# Altium PCB PCB1.PcbDoc
Units mm, origin at the board's own origin, x right, y up, seen from the top; angles counter-clockwise.
Board outline 50 x 25 mm, 2 copper layers (Top Layer, Bottom Layer); 12 components, 7 nets, 32 pads, 0 vias.
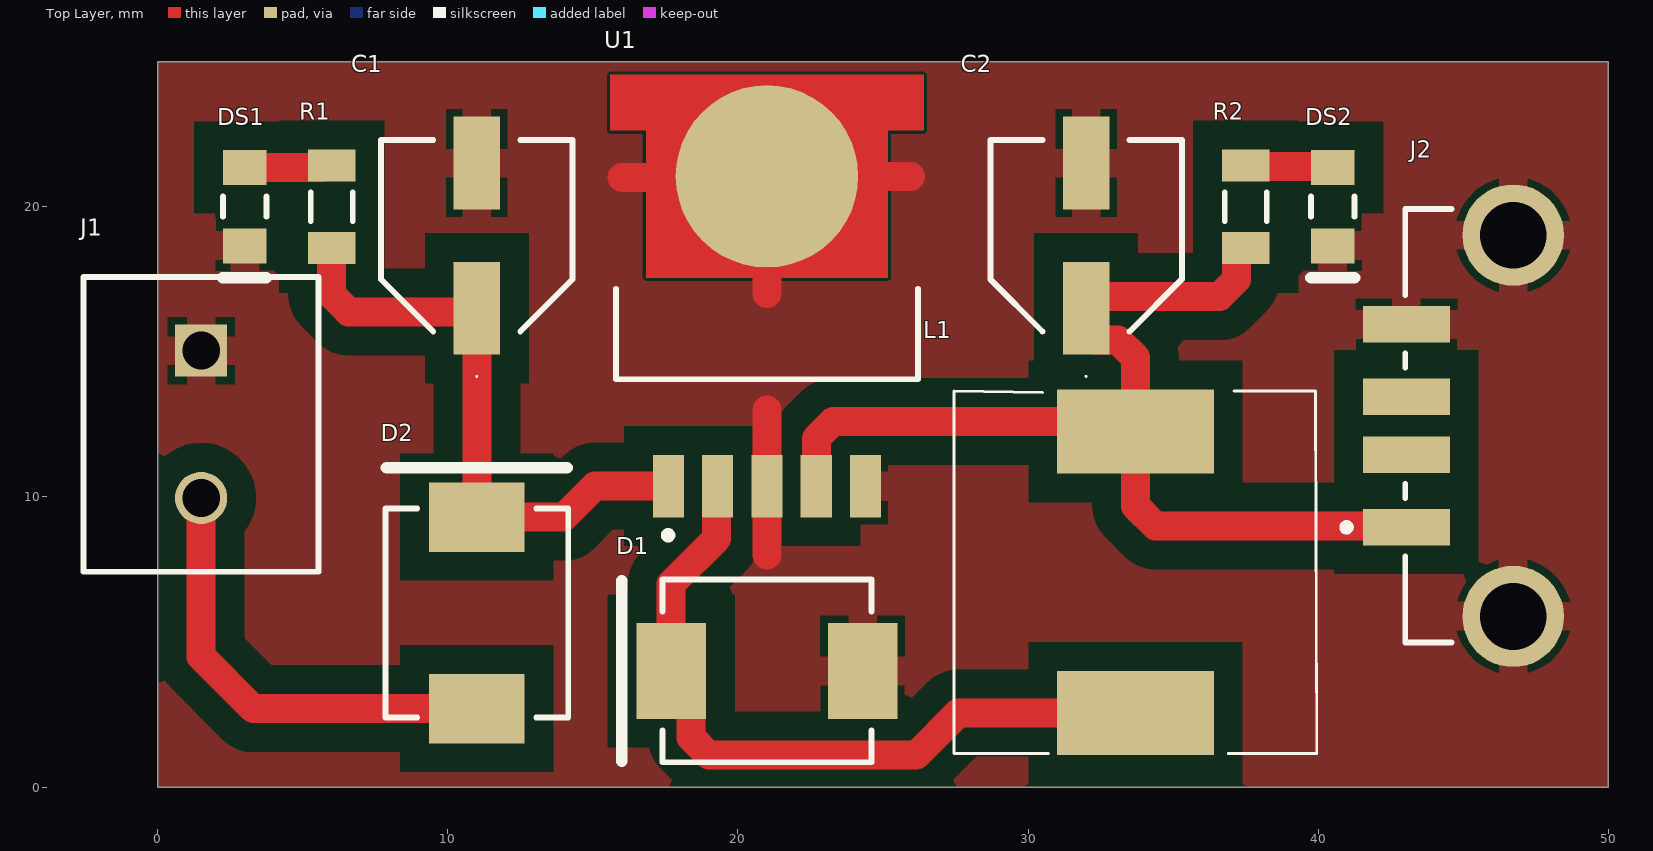
[diagram p0: Top Layer view]
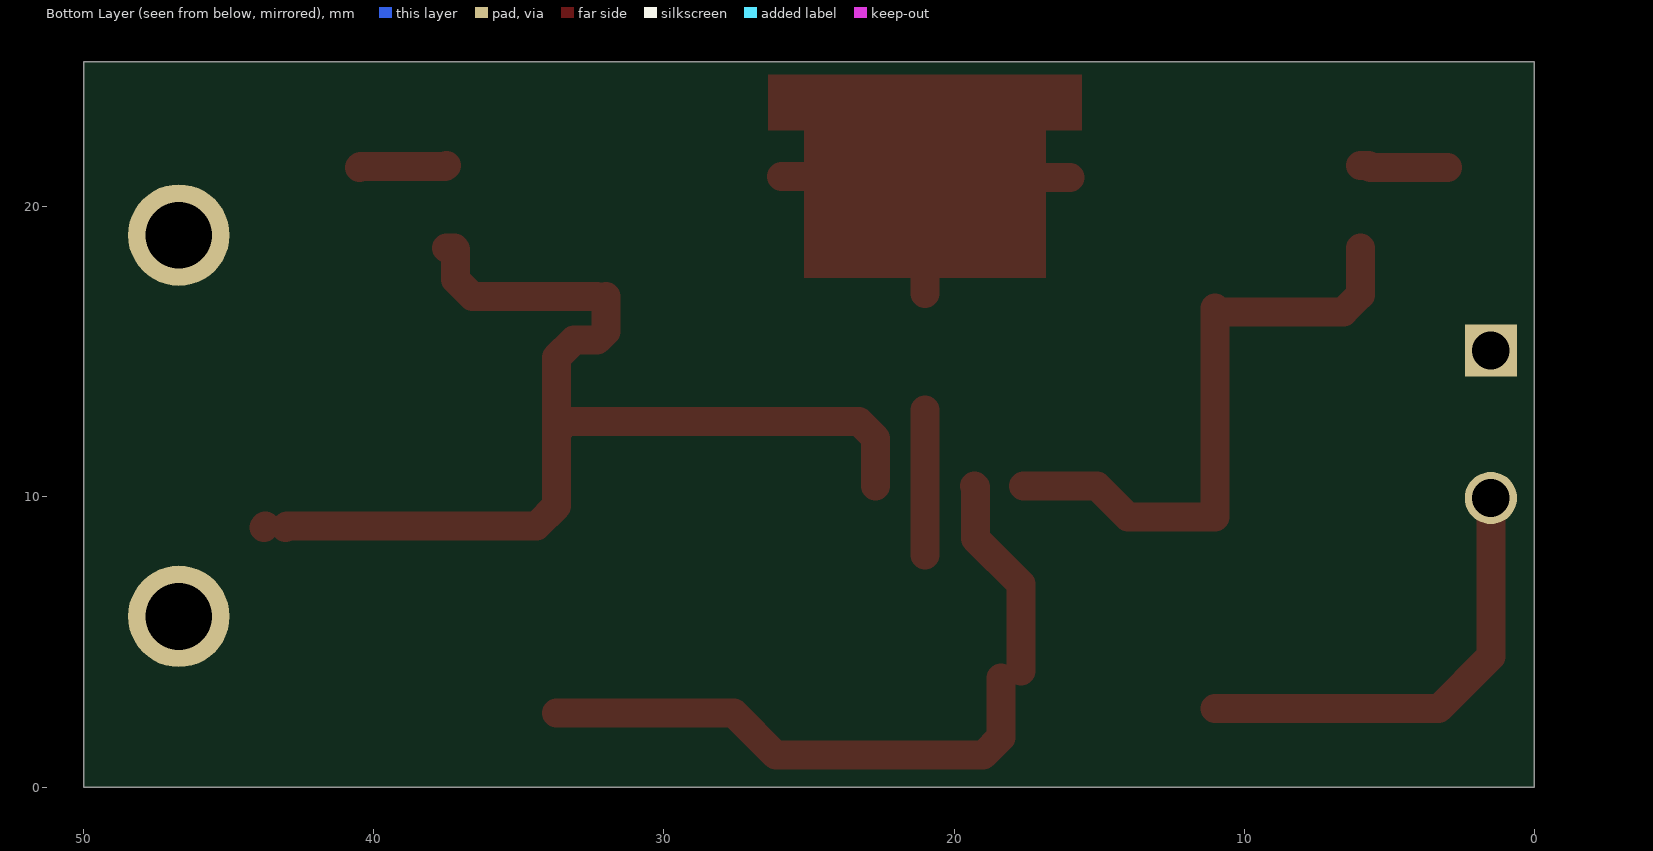
[diagram p1: Bottom Layer view, seen from below]
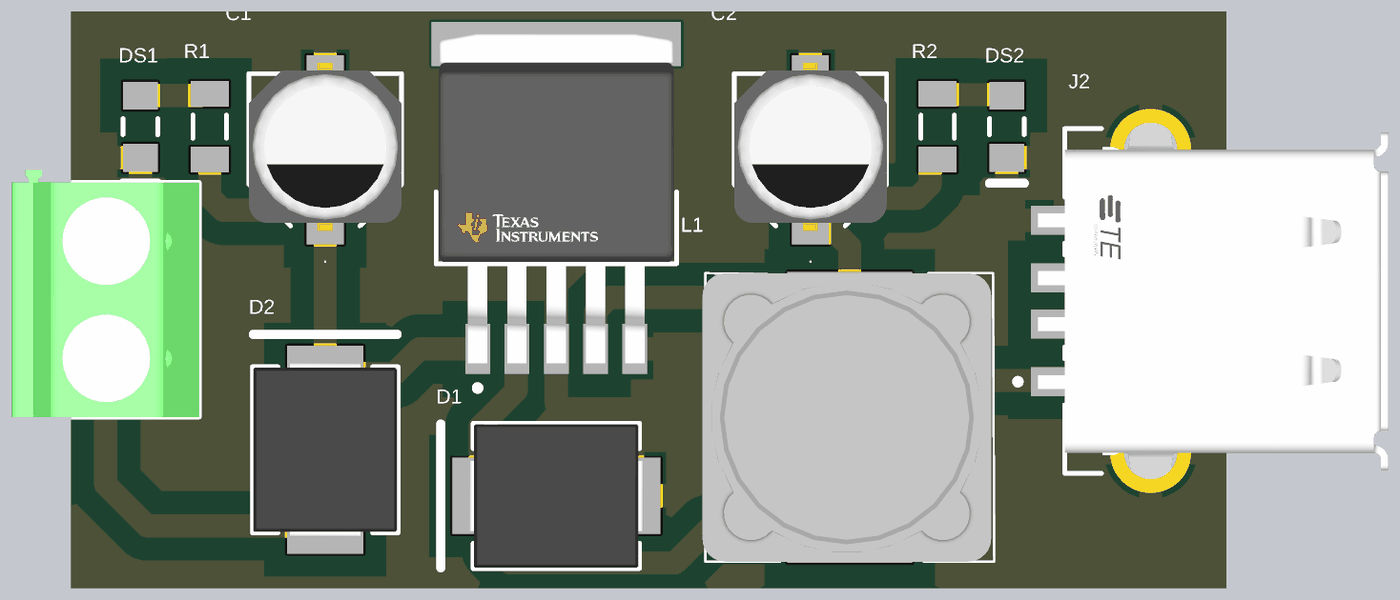
[diagram p2: 3D render of the assembled board from above, using the file's embedded part models]

## Layer stack, top to bottom
Top Solder: solder mask 0.0102, Solder Resist, Dk 3.5
Top Layer: signal copper 0.0356
Dielectric 1: dielectric 0.32, FR-4, Dk 4.8
Bottom Layer: signal copper 0.0356
Bottom Solder: solder mask 0.0102, Solder Resist, Dk 3.5

## Board outline
0,0 0,25 50,25 50,0

## Design rules (kind name [scope] priority, off if disabled: settings)
Clearance [All] p1: gap=0.1 ignorepadtopadclearanceinfootprint=FALSE except(1: Arc-Poly Track-Poly SMDPad-Poly THPad-Poly Via-Poly Fill-Poly Poly-Poly)
PolygonConnect [All] p1: thpad.connectstyle=Relief thpad.reliefconductorwidth=1 thpad.reliefentries=4 thpad.polygonreliefangle="90 Angle" thpad.airgapwidth=0.254 smdpad.connectstyle=Relief smdpad.reliefconductorwidth=1 smdpad.reliefentries=4 smdpad.polygonreliefangle="90 Angle" smdpad.airgapwidth=0.254 via.connectstyle=Relief via.reliefconductorwidth=0.254 via.reliefentries=4 via.polygonreliefangle="90 Angle" via.airgapwidth=0.254
RoutingVias [All] p1: holewidth=0.711 width=1.27 viastyle="Through Hole" minholewidth=0.711 minwidth=1.27 maxholewidth=0.711 maxwidth=1.27
SolderMaskExpansion [All] p1: expansion=0.102 istentingtop=FALSE
SupplyNets "Schematic Supply Nets_3" [InNet('VCC')] p1: voltage=0.000
SupplyNets "Schematic Supply Nets_2" [InNet('GND')] p2: voltage=0.000
SupplyNets "Schematic Supply Nets_1" [InNet('+12')] p3: voltage=0.000
SupplyNets "Schematic Supply Nets" [InNet('+5')] p4: voltage=0.000
Width [All] p1: maxlimit=1.5 minlimit=0.254 preferedwidth=0.254 minimp=50.000000 maximp=50.000000 favimp=50.000000
30 further rules are at their usual default settings.

## Components (designator, comment, footprint, x,y, rotation, side; value= is the part's Value field where it differs from the comment)
C1 "25V 100uF" EEHZA1E101XP 11,19 r90 top
C2 "10V  470uF" EEHZA1E101XP 32,19 r90 top
D1 "MBR310" LFUS-DO-214AB-2_V 21,4 r180 top
D2 "MURS360T3G" LFUS-DO-214AB-2_V 11,6 r90 top
DS1 "RED" LUMX-SML-LX1206IC_V 3,20 r270 top
DS2 "RED" LUMX-SML-LX1206IC_V 40.5,20 r270 top
J1 "1729128" PHOE-1729128-2_V 1.5,12.5 r270 top
J2 "292303-7" FP-292303-7-MFG 50,12.45 r180 top
L1 "100uH" SRR1260101M 33.7,7.4 r90 top
R1 "1K" RESC3216X70X50NL05T20 6,20 r270 top
R2 "1K" RESC3216X70X50NL05T20 37.5,20 r270 top
U1 "LM2576SX-5.0/NOPB" FP-KTT0005B-MFG 21,18.5 r0 top

## Footprints (in the part's own frame and the unit in brackets; to place one, negate y for a bottom-side part, rotate by r counter-clockwise, add the part's x,y. Pads: shape width x height; smd on the part's side, far side on the other; paste and mask are expansions set on the pad)
EEHZA1E101XP [mm]
  rect 3.2x1.6 smd: 1(-2.5,0) 2(2.5,0)
  silkscreen extent -4.88,-3.3 3.3,3.3, body extent -3.52,-3.3 3.78,3.3, height 5.8
FP-292303-7-MFG [mm]
  rect 3x1.25 smd paste+0 mask+0: 1(6.96,3.5) 2(6.96,1) 3(6.96,-1) 4(6.96,-3.5)
  round 3.5 hole 2.3 paste-2539.97 mask+0: 5(3.28,6.57) 6(3.28,-6.57)
  silkscreen extent 5.4,-7.47 9.15,7.47, body extent -7.1,-8.42 8.56,8.42, height 0.25
FP-KTT0005B-MFG [mm]
  rect 1.07x2.16 smd paste+0 mask+0: 1(-3.4,-8.13) 2(-1.7,-8.13) 3(0,-8.13) 4(1.7,-8.13) 5(3.4,-8.13)
  round 6.291 smd paste+0 mask+0: 6(0,2.545)
  Top Layer region: -5.4,6.04 5.4,6.04 5.4,4.13 4.165,4.13 4.165,-0.95 -4.165,-0.95 -4.165,4.13 -5.4,4.13 -5.4,6.04
  silkscreen extent -5.21,-9.95 5.21,-1.33, body extent -5.5,-9.31 5.5,6.14, height 0.25
LFUS-DO-214AB-2_V [mm] "Molded Diode, 2-Leads, Body 7.11x6.22mm"
  rect 2.4x3.3 smd: 1(-3.3,0) 2(3.3,0)
  silkscreen extent -3.6,-3.15 5,3.15, body extent -3.77,-3.11 3.77,3.11, height 2.62
LUMX-SML-LX1206IC_V [mm] "SMD, 2-Leads, Body 3.2x1.5mm"
  rect 1.2x1.5 smd: 1(-1.35,0) 2(1.35,0)
  silkscreen extent -0.35,-0.75 2.45,0.75, body extent -1.6,-0.8 1.6,0.8, height 1.1
PHOE-1729128-2_V [mm] "Receptacle, 2-Leads, Body 8.1x10.16mm, Pitch 5.08mm"
  rect 1.8x1.8 hole 1.3: 1(-2.54,0)
  round 1.8 hole 1.3: 2(2.54,0)
  silkscreen extent -5.08,-4.05 5.08,4.05, body extent -5.65,-4.05 5.08,4.05, height 10.01
RESC3216X70X50NL05T20 [mm] "Chip Resistor, 2-Leads, Body 3.20x1.60mm, IPC Medium Density"
  rect 1.1x1.65 smd: 1(-1.425,0) 2(1.425,0)
  silkscreen extent -0.5,-0.72 0.5,0.72, body extent -1.63,-0.82 1.62,0.82, height 0.7
SRR1260101M [mm]
  rect 2.9x5.4 smd: 1(-4.85,0) 2(4.85,0)
  silkscreen extent -6.25,-6.25 6.25,6.25, body extent -6.25,-6.12 6.25,6.38, height 6

## Part data
C1: library part EEH-ZA1E101XP, "BXJ25VC100MF80TP", Manufacturer_Name=Panasonic, Mouser Part Number=667-EEH-ZA1E101XP, Datasheet Link=http://industrial.panasonic.com/cdbs/www-data/pdf/RDD0000/ABA0000C1221.pdf, Geometry.Height=8.3mm, Manufacturer_Part_Number=EEH-ZA1E101XP, Mouser Price/Stock=https://www.mouser.co.uk/ProductDetail/Panasonic/EEH-ZA1E101XP?qs=7UCyOFMWVHbBL6OBgRrCPQ%3D%3D
C2: library part EEH-ZA1E101XP, "EEE-FTA471XAP", Manufacturer_Name=Panasonic, Mouser Part Number=667-EEH-ZA1E101XP, Datasheet Link=http://industrial.panasonic.com/cdbs/www-data/pdf/RDD0000/ABA0000C1221.pdf, Geometry.Height=8.3mm, Manufacturer_Part_Number=EEH-ZA1E101XP, Mouser Price/Stock=https://www.mouser.co.uk/ProductDetail/Panasonic/EEH-ZA1E101XP?qs=7UCyOFMWVHbBL6OBgRrCPQ%3D%3D
D1: library part CMP-2000-07111-1, "MB310_R1_00001", Capacitance @ Frequency=-, Current - Peak Pulse (10/1000µs)=145.7A, Manufacturer=Littelfuse, Operating Temperature=-55°C~150°C(TJ), Package / Case=DO-214AB,SMC, Package Description="2-Pin Surface Mount Device, Body 6.855 x 5.905 mm", Package Reference=DO-214AB, Power - Peak Pulse=1500W(1.5kW), Power Line Protection=No, Standard Package=3,000, Supplier Device Package=DO-214AB(SMCJ), Voltage - Breakdown (Min)=6.67V, Voltage - Clamping (Max) @ Ipp=10.3V, Voltage - Reverse Standoff (Typ)=6V, Applications=GeneralPurpose, Bidirectional Channels=-, Catalog Drawings=SMCJDO-214ABSeries, Category=CircuitProtection, Datasheet URL=http://www.littelfuse.com/products/tvs-diodes/surface-mount/~/media/electronics/datasheets/tvs_diodes/littelfuse_tvs_diode_smcj_datasheet.pdf.pdf, Datasheet Version=11/2015, Family=TVS-Diodes, Featured Product=LittelfuseandDigi-KeyofferkitsforpopularTVSSMDdiodes, Manufacturer URL=http://www.littelfuse.com/, Mounting Technology=SurfaceMount, Mounting Type=SurfaceMount, Packaging=Tape&Reel(TR), Series=SMCJ, Type=Zener, Unidirectional Channels=1
D2: library part CMP-2000-07111-1, Capacitance @ Frequency=-, Current - Peak Pulse (10/1000µs)=145.7A, Manufacturer=Littelfuse, Operating Temperature=-55°C~150°C(TJ), Package / Case=DO-214AB,SMC, Package Description="2-Pin Surface Mount Device, Body 6.855 x 5.905 mm", Package Reference=DO-214AB, Power - Peak Pulse=1500W(1.5kW), Power Line Protection=No, Standard Package=3,000, Supplier Device Package=DO-214AB(SMCJ), Voltage - Breakdown (Min)=6.67V, Voltage - Clamping (Max) @ Ipp=10.3V, Voltage - Reverse Standoff (Typ)=6V, Applications=GeneralPurpose, Bidirectional Channels=-, Catalog Drawings=SMCJDO-214ABSeries, Category=CircuitProtection, Datasheet URL=http://www.littelfuse.com/products/tvs-diodes/surface-mount/~/media/electronics/datasheets/tvs_diodes/littelfuse_tvs_diode_smcj_datasheet.pdf.pdf, Datasheet Version=11/2015, Family=TVS-Diodes, Featured Product=LittelfuseandDigi-KeyofferkitsforpopularTVSSMDdiodes, Manufacturer URL=http://www.littelfuse.com/, Mounting Technology=SurfaceMount, Mounting Type=SurfaceMount, Packaging=Tape&Reel(TR), Series=SMCJ, Type=Zener, Unidirectional Channels=1
DS1 DS2: library part CMP-2000-07123-1, "HL-PC-3216S9AC", Color=Red, Manufacturer=Lumex, Operating Temperature=-25to85C, Package Description="2-Pin Surface Mount Device, Body 3.2 x 1.5 mm", Package Reference=SML-LX1206IC, Part No=SML-LX1206IC-TR, Reverse Voltage=5(Min)V, Supplier_Package=SMD, Datasheet URL=http://www.lumex.com/content/files/ProductAttachment/SML-LX1206IC-TR.pdf, Datasheet Version="Rev. J, 08/2012", Dimension=3.2x1.6x1.1mm, Dominant Wavelength=N/A, ECCN=EAR99, Family=SML-LX1206IC, HTS=8541402000, LED Material=GaAsP, Lens Appearance=ColorlessNonDiffused, Lens Dimensions=2x1.6x0.5mm, Manufacturer URL=http://www.lumexinstruments.com/, Mounting=SurfaceMount, Mounting Technology=SurfaceMount, Number of LEDs=1, Packaging=TapeandReel, Peak Wavelength=635nm, Pin_Count=2, RoHS=Unknown, Supplier=Lumex, Supplier Standard Pack=3,000, Type=Uni-Color, Viewing Angle=160, Intensity=6mcd
J1: library part CMP-2000-05815-1, "PCB Terminal Block, 13.5 A, 400 V, 2-Pin THD, RoHS, Bulk", Current Rating=13500mA, Manufacturer="Phoenix Contact", Package Description="2-Pin Through Hole Device, Body 8.1 x 10.16 mm, Pitch 5.08 mm", Package Reference=1729128-2, Package Version=03/2015, Voltage Rating=400V, Datasheet URL=https://datasheet.ciiva.com/16046/1729128-16046181.pdf, Datasheet Version=12/2013, Manufacturer URL=http://www.phoenixcontact.com/, Mounting Technology=ThroughHole, No. of Positions=2, No. of Rows=1, Orientation=Horizontal, Package URL=https://www.phoenixcontact.com/online/portal/pi/pxc/product_detail_page/!ut/p/b1/3VdJjqNKFDxLH8AFycySyWY2ozFsEPOMMQaDOX1XedGL_1Vdm5YXJleknhSKeBkvI6EA8ncAo3AYoDhBQGco6KN7VURTdemj9us_IEKEZo_YHiPAEWEFmDGOHMORkqKYCORBZxgL7ZoaZYcbFFUZ3fqxSY6GOuxydWUuHqz1ynmMFygu583Bob0Ewr6Sd_l-5m-kAueHiB0jpRwZwe58wwtkpxtMYd_LmGcDRU02dRNEyWt6Y2ti5pSyJ_reIkzIulrqApdnbT11V5jnCKbYNCvhEM1MCpPByat_X379-iThf08CI5GfOPqfBeS3BRoBOdD55AKVv0iLwCMq-2BrzXWSGRH7pUGD9uwXQjiph3xL0DKQwdGa0JImiIOmBNOestqgwTHSSs2oOep-78apyXQBvNi8ZLaFjvjWvcaUEBu0MC6Wbe-d6mB0FAebo2lUWinqYaZs5DAYzV0RP9yitUjnGJ0iI9xhZkT42OCQNUJJhkgWINNQLP2JFP6OpMg3JCVg70jqHT0lvKOnhHf0lPuOnnLf0VPuWx6_dxwUIvwk5WMkT0kLL1mh61l2yZVSzG3pYV_bqo-mj6uMKwKwdnnW8Jh5RTOJzMOA5c-eJDaZQw4mTMPH02PvS_ZAqNVjVTo2WyYLkwH_KU1mmmG5kjRhDqPXLwwVHvVOjCM60-fpXvTDfMGW1PVFVS1r4e4yVDk4ZdNbkUHvqPqQSeian4UD39fNKmachqdJ1NJbyk8rXT9mXTvPk3oE5meulKGgiruPJek-4I9hTT6G8ZLOyRSm2RRVbThERQad5OS28hdt4YW4vG0stgYYzsWsK4_7y6DZMjJSCqri1kyiZR5vD7pwIrNR7QwPHTcLTI5qT7eRlpHrdGiupYlqQDJ7zy_CND8fWWBoLRXxk1RVcXiBQwbTD4Xi7KL-FuO94t9xaqweXzH, Packing=Bulk, PartNumber=1729128, Pitch=5.08mm, RoHS=TRUE
J2: library part CMP-03360-000008-1, "CONN RCPT USB2.0 TYPEA 4P SMD RA", Current Rating=1A, Manufacturer="TE Connectivity", Temperature="-55°C to +85°C", Temperature Range High=+85°C, Temperature Range Low=-55°C, Voltage Rating=30V, Automotive=No, Category=Conn, ComponentLink2Description=Datasheet, ComponentLink2URL=https://www.te.com/usa-en/product-292303-7.html?te_bu=Cor&te_type=other&te_campaign=oct_glo_cor-oct-global-oth-prtnr-fy19-oct-octo-buy-bom_sma-298_2&elqCampaignId=35216, Conn Orientation="Right Angle", Contact Material=Gold,Nickel, Device Class L1=Connectors, Device Class L2="USB Connectors", Device Class L3=unset, Digikey Description="CONN RCPT USB2.0 TYPEA 4P SMD RA", Lead Free=Yes, Manufacturer Part Number=292303-7, Mouser Description="USB Connectors USB A R/A Recpt Assy SMT", Number of Contacts=4, Octopart=https://octopart.com/292303-7-te+connectivity-42840369, Package=292303-7, RoHS=TRUE, Shielding=true, USB Standard="USB 2.0", Is Female=yes
L1: library part SRR1260-101M, "SRI1209-101M", Manufacturer_Name=Bourns, Mouser Part Number=652-SRR1260-101M, Arrow Part Number=SRR1260-101M, Arrow Price/Stock=https://www.arrow.com/en/products/srr1260-101m/bourns?utm_currency=USD&region=nac, Datasheet Link=https://componentsearchengine.com/Datasheets/1/SRR1260-101M.pdf, Geometry.Height=6.5mm, Manufacturer_Part_Number=SRR1260-101M, Mouser Price/Stock=https://www.mouser.co.uk/ProductDetail/Bourns/SRR1260-101M?qs=uD%2FoUDWqfvQozr%2Ff4%252BPuSQ%3D%3D
R1 R2: library part CMP-2003-00541-1, "1206S4F1001T5E", Manufacturer=Panasonic, Part Number=ERJ-8GEY0R00V
U1: library part CMP-0069-00122-4, "IC REG BUCK 5V 3A TO263-5", Case/Package=TO-263-6, Max Operating Temperature=125°C, Max Output Current=3A, Max Input Voltage=40V, Min Operating Temperature=-40°C, Min Input Voltage=4V, Nominal Output Voltage=5V, Package Quantity=500, Quiescent Current=5mA, Switching Frequency=52kHz, Contact Plating=Tin, Efficiency=77%, Lead Free="Contains Lead", Mount="Surface Mount", Number of Outputs=1, Number of Pins=5, Operating Supply Voltage=40V, Output Current=3A, Output Type=Fixed, Output Voltage=5V, Packaging="Tape and Reel", Radiation Hardening=No, REACH SVHC="No SVHC", Series="SIMPLE SWITCHER®", Synchronous Rectifier=No

## Nets (pads, with @x,y where several pads share a name; then routed paths per layer and width w, separated by ;. In a path a pad name is that pad's centre, name@x,y a point inside that pad or via, vN(x,y) a via of type N, cw(c..) or ccw(c..) an arc to the next point about the centre after c; other vN are vias at no path point)
+5: C2.1 J2.1 L1.2 R2.2 U1.4 | length 38.1
  Top Layer w1: U1.4 22.7,12.014 23.286,12.6 33.35,12.6 L1.2 ; C2.1@32,16.6 32.3,16.9 36.589,16.9 37.175,17.486 37.175,18.525 37.225,18.575 R2.2 ; C2.1@32,16.9 32,15.7 32.3,15.4 33.1,15.4 33.7,14.8 L1.2 ; J2.1 42.99,9 34.386,9 33.7,9.686 L1.2 ; J2.1@43.74,9 J2.1@43.79,8.95
+12: C1.1 D2.2 R1.2 U1.1 | length 21.2
  Top Layer w1: R1.2 6,16.961 6.586,16.375 10.875,16.375 C1.1 D2.2 14,9.3 15.07,10.37 U1.1
GND: C1.2 C2.2 D1.1 DS1.2 DS2.2 J1.1 J2.4 J2.5 J2.6 U1.3 U1.5 U1.6 | length 19
  Top Layer w1: 16,21 20.955,21 U1.6 ; 21,8 U1.3 21,13 ; 21,17 U1.6@21,21 ; U1.6@21.045,21 U1.6 ; 25.955,21.045 U1.6
NetD1_2: D1.2 L1.1 U1.2 | length 25.3
  Top Layer w1: D1.2 17.7,7 19.265,8.565 19.265,10.335 U1.2 ; D1.2@18.386,3.764 18.386,1.714 19,1.1 26.144,1.1 27.594,2.55 L1.1
NetDS1_1: DS1.1 R1.1 | length 3
  Top Layer w1: DS1.1 5.65,21.35 5.725,21.425 R1.1
NetDS2_1: DS2.1 R2.1 | length 3
  Top Layer w1: R2.1 37.538,21.388 40.462,21.388 DS2.1
VCC: D2.1 J1.2 | length 15.7
  Top Layer w1: J1.2 1.5,4.5 3.3,2.7 D2.1
pads on no net: J2.2 J2.3

## Polygon pours and split planes (outlines as drawn)
GND on Top Layer "GND_L01_P000" (solid, pour order 0): 0,0 0,25 50,25 50,0

## Silkscreen, mask and mechanical layers (free items; w line width, h text height)
Mechanical 1:
  the board outline again, w0.254